# Altium PCB LT5560.PcbDoc
Units mil, origin at the board's own origin, x right, y up, seen from the top; angles counter-clockwise.
Board outline 1523 x 629 mil, 4 copper layers (Top Layer, Layer 1, Layer 2, Bottom Layer), stack 23.756 mil thick; 28 components, 20 nets, 83 pads, 39 vias.
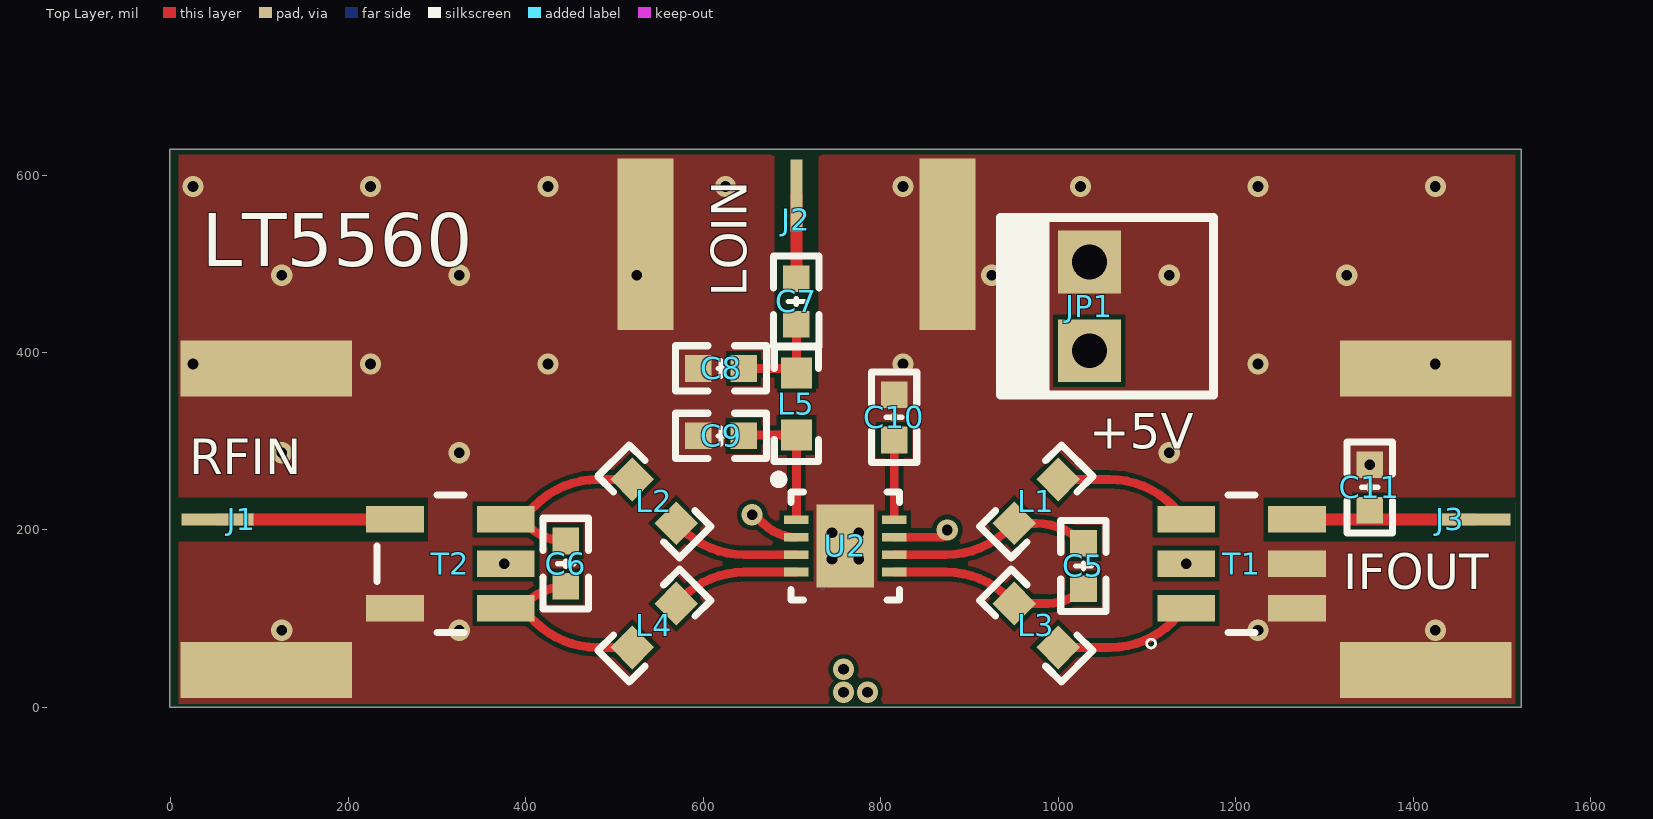
[diagram p0: Top Layer view]
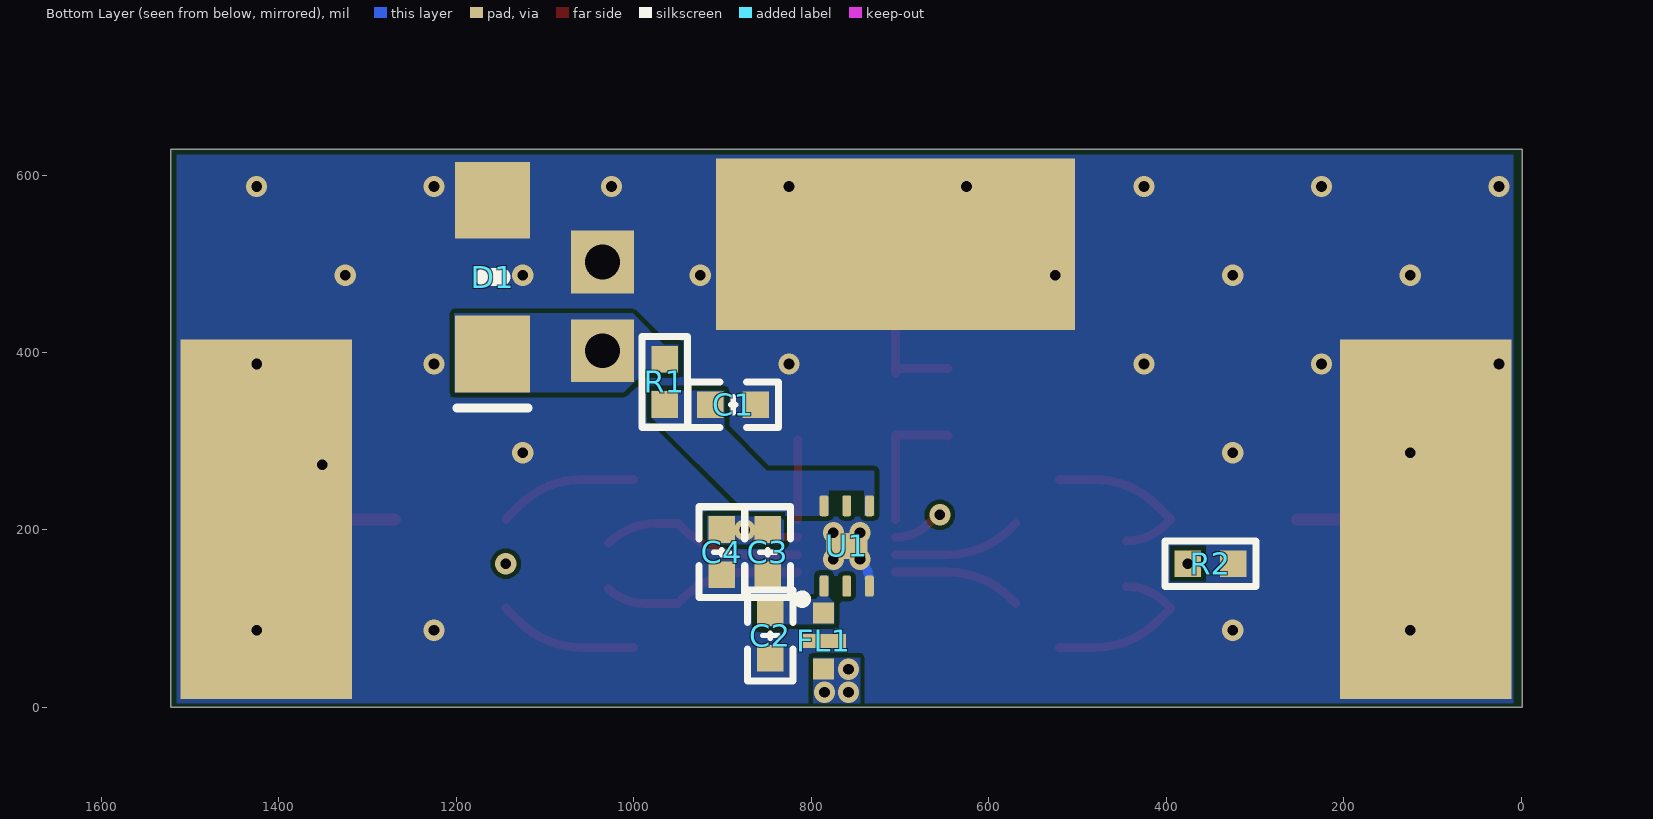
[diagram p1: Bottom Layer view, seen from below]
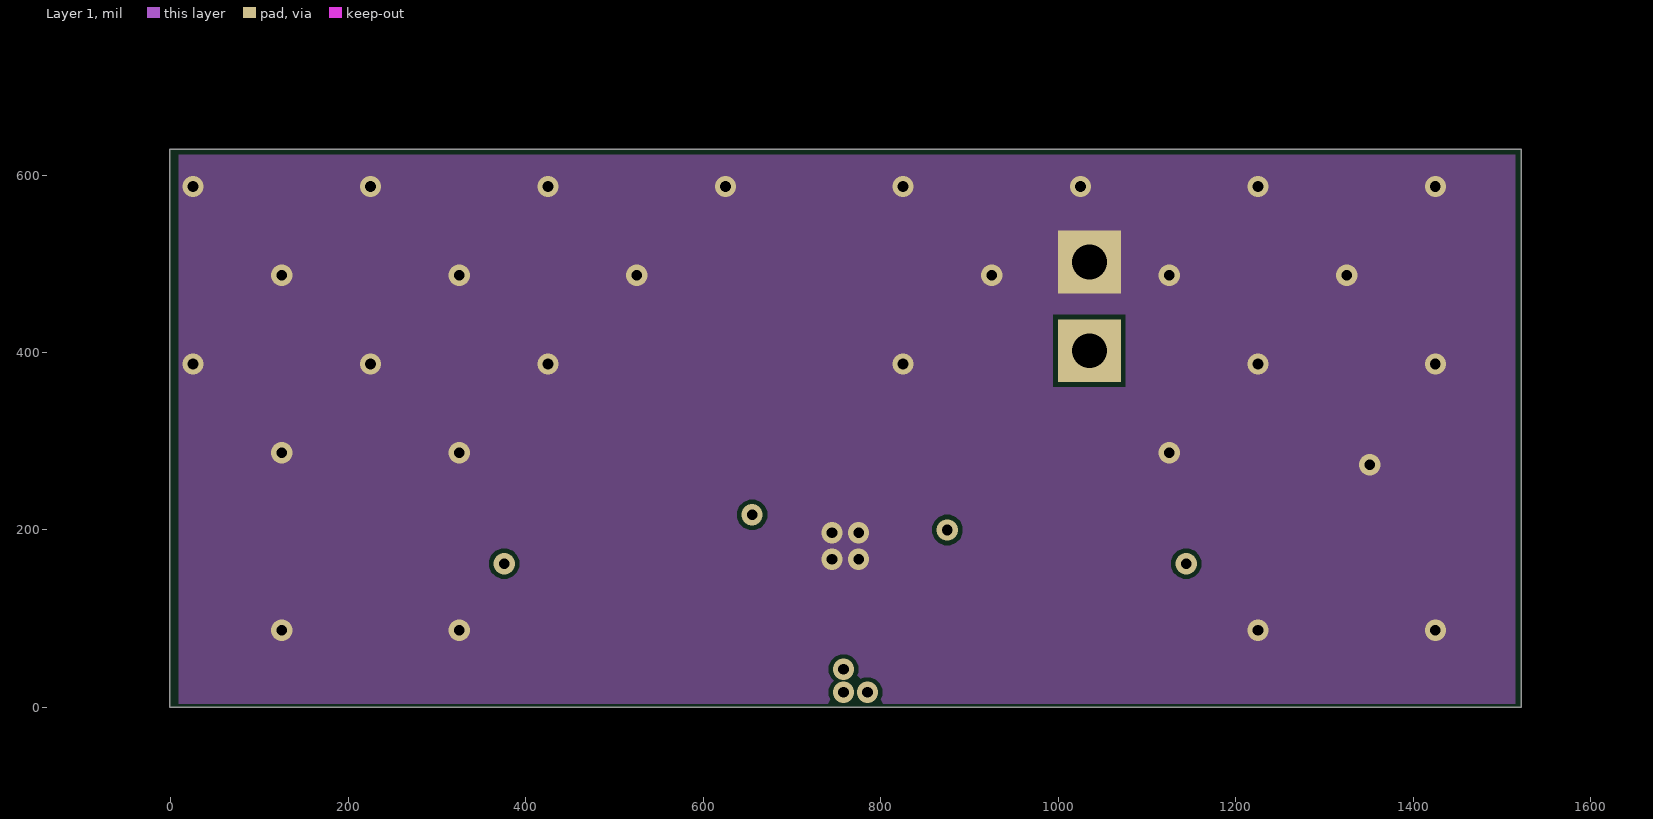
[diagram p2: Layer 1]
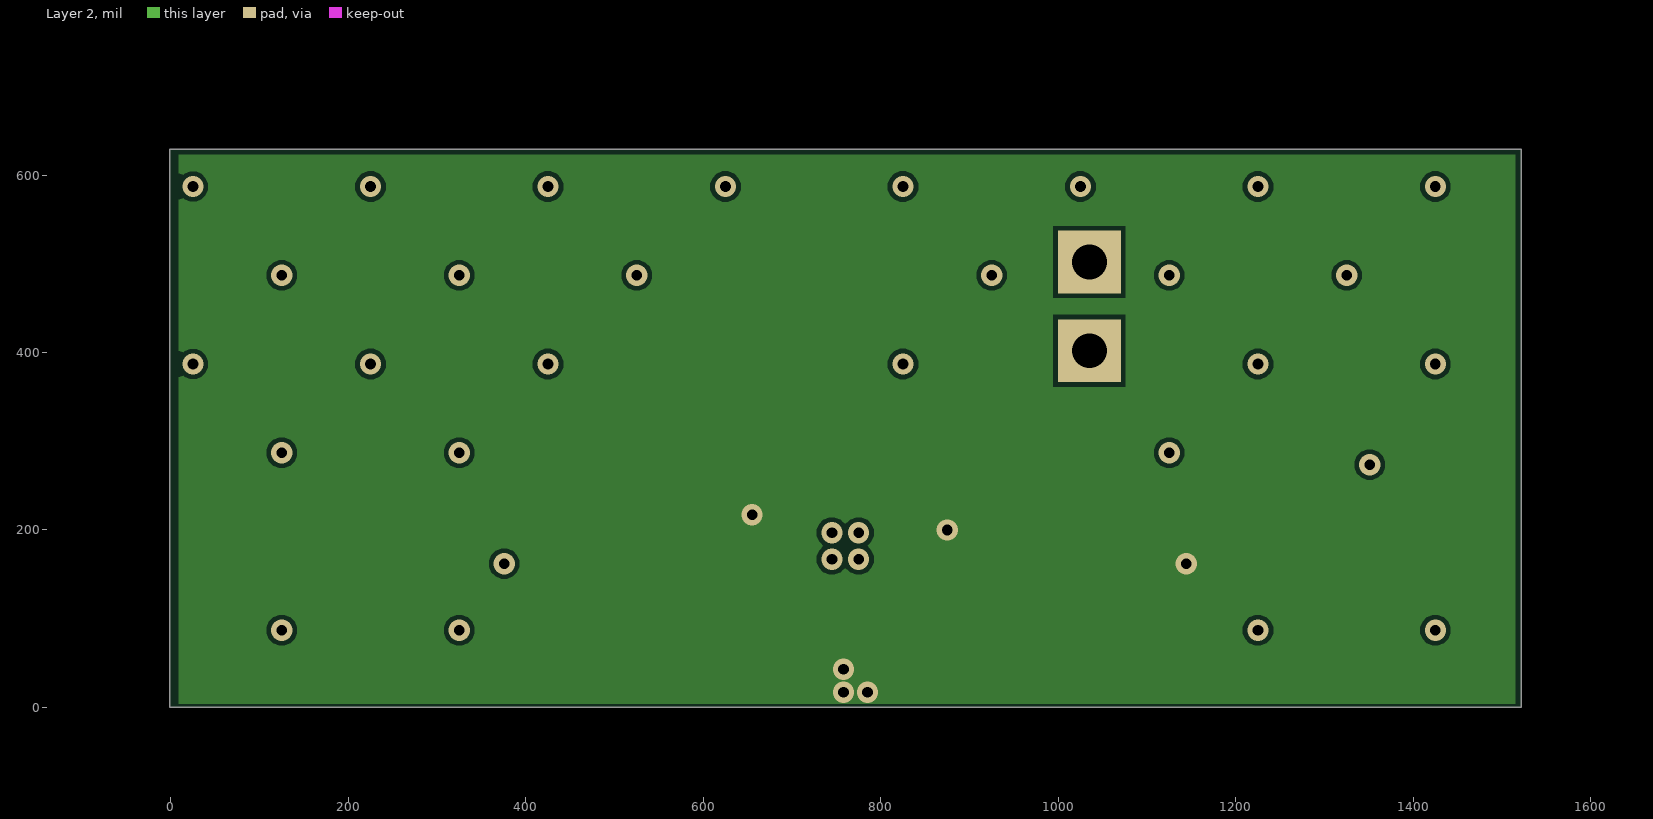
[diagram p3: Layer 2]
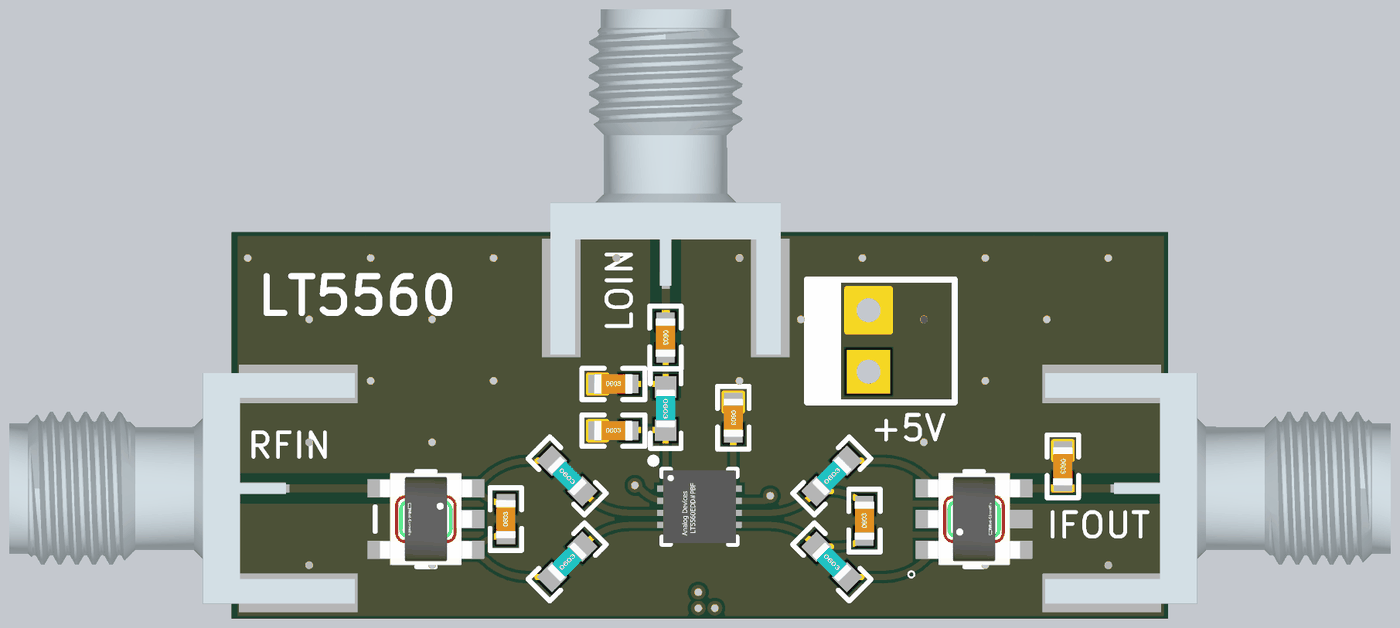
[diagram p4: 3D render of the assembled board from above, using the file's embedded part models]
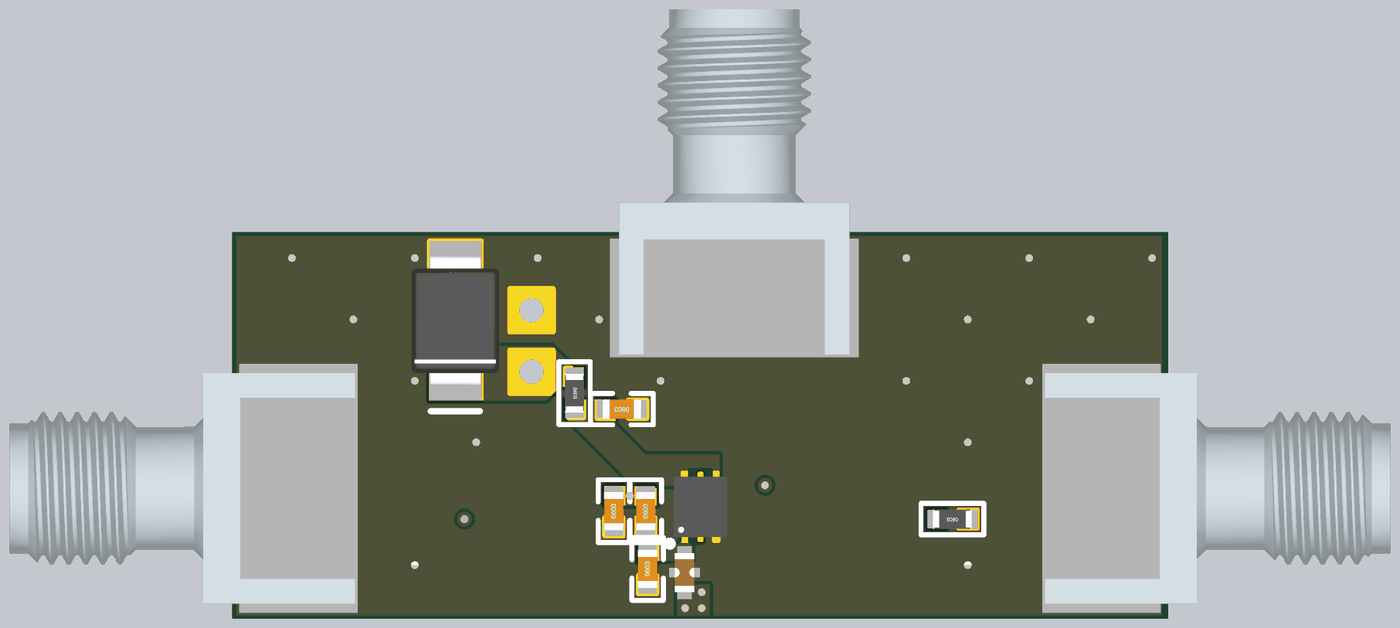
[diagram p5: 3D render of the assembled board from below, using the file's embedded part models]

## Layer stack, top to bottom
Top Solder: solder mask 0.4, Solder Resist, Dk 3.5
Top Layer: signal copper 1.4
Dielectric 2: prepreg 2.8, PP-006, Dk 4.1
Layer 1: signal copper 1.378
Dielectric 1: dielectric 12.6, FR-4, Dk 4.8
Layer 2: signal copper 1.378
Dielectric 3: prepreg 2.8, PP-006, Dk 4.1
Bottom Layer: signal copper 1.4
Bottom Solder: solder mask 0.4, Solder Resist, Dk 3.5

## Board outline
-1,0 1522,0 1522,629 -1,629

## Design rules (kind name [scope] priority, off if disabled: settings)
Clearance [All] p1: gap=5 ignorepadtopadclearanceinfootprint=TRUE
PlaneConnect [All] p1: planeconnectstyle=Direct reliefexpansion=20 reliefentries=4 reliefconductorwidth=10 reliefairgap=10
PolygonConnect [All] p1: connectstyle=Direct reliefconductorwidth=10 reliefentries=4 polygonreliefangle="90 Angle" airgapwidth=10
RoutingVias [All] p1: holewidth=28 width=50 viastyle="Through Hole" minholewidth=28 minwidth=50 maxholewidth=28 maxwidth=50
SolderMaskExpansion [All] p1: expansion=4 istentingtop=FALSE
Width [All] p1: maxlimit=15 minlimit=10 preferedwidth=10
29 further rules are at their usual default settings.

## Components (designator, comment, footprint, x,y, rotation, side; value= is the part's Value field where it differs from the comment)
C1 "1uF" "C 0603_L" 888,341 r0 bottom
C2 "1uF" "C 0603_L" 846,81 r90 bottom
C3 "1uF" "C 0603_L" 849,175.01 r90 bottom
C4 "1nF" "C 0603_L" 901,175 r90 bottom
C5 "0.5pF" "C 0603_L" 1028.4,159.47 r90 top
C6 "39pF" "C 0603_L" 445,162 r90 top
C7 "1nF" "C 0603_L" 704.6,457.55 r270 top
C8 "OPEN" "C 0603_L" 620,382 r0 top
C9 "8.2pF" "C 0603_L" 620,306 r0 top
C10 "1nF" "C 0603_L" 815,327 r270 top
C11 "OPEN" "C 0603_L" 1351,248 r270 top
D1 "SMBJ5.0A" SMBJ5.0A 1159,485 r90 bottom
FL1 "NFM18PC104R1C3D" FIL_NFM18PC104R1C3D 786,75 r270 bottom
J1 "132414" CONN_132414_AMP -92.5,212 r90 top
J2 "132414" CONN_132414_AMP 705,722 r0 top
J3 "132414" CONN_132414_AMP 1614.13,212 r270 top
JP1 "HDR-1X2" KF2510-LI-2P 1035,452 r90 top
L1 "120nH" "L 0603" 975.22,232.26 r45 top
L2 "33nH" "L 0603" 544.78,232.26 r315 top
L3 "120nH" "L 0603" 975.22,92.37 r315 top
L4 "33nH" "L 0603" 544.78,92.37 r45 top
L5 "68nH" "L 0603" 705,342 r270 top
R1 "120Ω磁珠" "R 0603_L" 965,367 r270 bottom
R2 "?" "R 0603_L" 350,162 r0 bottom
T1 "TC4-1T+" TC4-1T+-Footprint-1 1204.63,162 r90 top
T2 "TC1-1T+" FP-TC1-1-13M+-MFG 315,162 r270 top
U1 "LP5900SD-3.3/NOPB" LP5900-3.3/NOPB 760,182 r90 bottom
U2 "LT5560EDD#PBF" FP-DD-8-05-08-1698-MFG 760,182 r0 top

## Footprints (in the part's own frame and the unit in brackets; to place one, negate y for a bottom-side part, rotate by r counter-clockwise, add the part's x,y. Pads: shape width x height; smd on the part's side, far side on the other; paste and mask are expansions set on the pad)
"C 0603_L" [mil] "无极性贴片电容"
  rect 30x30 smd: 1(-25.59,0) 2(25.59,0)
  silkscreen extent -51,-26 51,26, body extent -31,-16 31,16, height 32
CONN_132414_AMP [mil]
  rect 13.48x81 smd paste+0 mask+0: 1(0,-145)
  rect 63x193 smd mask+0: 2(-170,-200) 3(170,-200)
  rect 405x193 smd far side mask+0: 4(0,-200)
  body extent -188,-292 188,270, height 162
FIL_NFM18PC104R1C3D [mm]
  rect 0.6x0.6 smd mask+0: 1(-0.8,0) 3(0.8,0)
  rect 0.4x1.27 smd mask+0: 2(0,0)
  rect 0.4x1.27 on Bottom Solder mask+0: ""(0,0)
  body extent -0.8,-0.4 0.8,0.4, height 0.7
FP-DD-8-05-08-1698-MFG [mm]
  rect 0.7x0.254 smd paste+0 mask+0: 1(-1.4,0.75) 2(-1.4,0.25) 3(-1.4,-0.25) 4(-1.4,-0.75) 5(1.4,-0.75) 6(1.4,-0.25) 7(1.4,0.25) 8(1.4,0.75)
  rect 1.65x2.38 smd paste+0 mask+0: 9(0,0)
  silkscreen extent -2.03,-1.55 1.55,2.03, body extent -1.85,-1.8 1.85,1.8, height 0.25
FP-TC1-1-13M+-MFG [mil]
  rect 30x65 smd paste+0 mask+0: 1(-50,62.5) 2(0,62.5) 3(50,62.5) 4(50,-62.5) 6(-50,-62.5)
  silkscreen extent -78,-82 78,15, body extent -81,-99 81,99, height 10
KF2510-LI-2P [mm] "接插件/2A"
  rect 1.8x1.8 hole 1: 1(-1.27,0) 2(1.27,0)
  silkscreen extent -2.59,-3.56 2.54,2.54, body extent -2.54,-3.5 2.54,2.4, height 11.05
"L 0603" [mil] "小功率贴片电感"
  rect 35x35 smd: 1(-35,0) 2(35,0)
  silkscreen extent -65,-25 65,25, body extent -31,-16 31,16, height 31
LP5900-3.3/NOPB [mm] "SON, 6-Leads, Body 2.2x2.5mm, Pitch 0.65mm, NSC Recommended (SC-70 Land)"
  rrect40% 0.6x0.25 smd paste-0.125 mask+0.051: 1(-1.15,0.65) 2(-1.15,0) 3(-1.15,-0.65) 4(1.15,-0.65) 5(1.15,0) 6(1.15,0.65)
  rrect13% 0.75x1.2 smd paste-0.6 mask+0.051: 7(0,0)
  silkscreen extent -1.65,1.15 -1.4,1.39, body extent -1.25,-1.1 1.25,1.1, height 0.8
"R 0603_L" [mil] "1/10W贴片电阻 https://item.taobao.com/item.htm?ft=t&id=613637044352"
  rect 30x30 smd: 1(-25.59,0) 2(25.59,0)
  silkscreen extent -51,-26 51,26, body extent -31,-16 31,16, height 16
SMBJ5.0A [mm]
  rect 2.2x2.15 smd: 1(-2.2,0) 2(2.2,0)
  silkscreen extent -3.74,-1.02 0,1.02, body extent -2.68,-1.81 2.68,1.81, height 2.65
TC4-1T+-Footprint-1 [mil]
  rect 30x65 smd paste+0 mask+0: 1(-50,60.5) 2(0,60.5) 3(50,60.5) 4(50,-64.5) 5(0,-64.5) 6(-50,-64.5)
  silkscreen extent -95,-17 78,105, body extent -81,-101 81,97, height 10

## Part data
C1 C2 C3 C4 C5 C6 C7 C8 C9 C10 C11: library part C, "贴片电容", BOM名称=贴片电容, 下单链接=https://item.taobao.com/item.htm?ft=t&id=613637044352, 淘宝ID=小糖豆的小窝窝
D1: "SMBJX.XA Seires TVS", Package="DO-214 Littelfuse", Availability="In Stock", Check_prices=https://www.snapeda.com/parts/SMBJ5.0A/Littelfuse+Inc/view-part/?ref=eda, MF=Littelfuse, MP=SMBJ5.0A, Price=None, Purchase-URL=https://pricing.snapeda.com/search/part/SMBJ5.0A/?ref=eda, SnapEDA_Link=https://www.snapeda.com/parts/SMBJ5.0A/Littelfuse+Inc/view-part/?ref=snap
FL1: "SMD Capacitor with Capacitance: 0.10uF Tol. 20%. Rated Voltage: 16Vdc", Package=NONSTANDARD, Digi-Key_Part_Number=490-6969-1-ND, Digi-Key_Purchase_URL=https://www.digikey.com/product-detail/en/murata-electronics/NFM18PC104R1C3D/490-6969-1-ND/3846166?utm_source=snapeda&utm_medium=aggregator&utm_campaign=symbol, MF=Murata, MP=NFM18PC104R1C3D, SnapEDA_Link=https://www.snapeda.com/parts/NFM18PC104R1C3D/Murata/view-part/4375738/?ref=snap
J1 J2 J3: "No Description Available", Mfr_Name="Amphenol ICC", Copyright="Copyright (C) 2022 Ultra Librarian. All rights reserved.", Manufacturer_Part_Number=132414, RefDes=RefDes, Type=DEV
JP1: library part "Header 2", "2P接插件", BOM名称=2P接插件, 下单链接=https://item.taobao.com/item.htm?ft=t&id=613637044352, 淘宝ID=小糖豆的小窝窝
L1 L2 L3 L4 L5: library part L, "小功率贴片电感", BOM名称=小功率贴片电感, 下单链接=https://item.taobao.com/item.htm?ft=t&id=613637044352
R1 R2: library part R, "贴片电阻", BOM名称=贴片电阻, 下单链接=https://item.taobao.com/item.htm?ft=t&id=613637044352, 淘宝ID=小糖豆的小窝窝
T1: "Xfmr, Isolation, 50 ohm, 4: 1, 0.5-300 MHz, SMT"
T2: library part CMP-00025-00004-7, "RF Transformer 1: 1 5 Terminal SMD", RoHS Compliant=No
U1: "Ultra Low Noise, 150mA Linear Regulator for RF/Analog Circuits Requires No Bypass Capacitor, 6-pin LLP, Pb-Free", Manufacturer="Texas Instruments", PackageTopMarking=XTT*L16, PowerWise=N, ComponentLink1Description="Datasheet URL", ComponentLink1URL=http://www.ti.com/general/docs/lit/getliterature.tsp?genericPartNumber=LP5900&fileType=pdf, CompType="LDO IC", PackageDescription="LLP, Plastic, Dual, 2.2 x 2.5 x 0.8mm Body, 6 Lead, 0.65mm Pitch, No Pullback", PackageReference=NGF0006A, PinCount=6, RoHS=Y
U2: library part LT5560EDD, "IC MIXER 10KHZ-4GHZ UP/DWN 8DFN", Case/Package=DFN, Frequency=10kHz, Max Frequency=4GHz, Max Operating Temperature=85°C, Max Supply Voltage=5V, Min Operating Temperature=-40°C, Min Supply Voltage=2.7V, Operating Supply Current=12mA, Operating Supply Voltage=3V, Package Quantity=121, Power Gain=2.7dB, Bandwidth=4GHz, Gain=2.4dB, Height=0.7mm, Lead Free="Lead Free", Length=3mm, Min Frequency=10kHz, Mount="Surface Mount", Noise Figure=9.3dB, Number of Pins=8, Packaging=Rail/Tube, Radiation Hardening=No, RoHS Compliant=Yes, Series=LT5560, Width=3mm

## Via types
v1: diameter 24, hole 12, Top Layer to Bottom Layer, tented both sides, 39 vias

## Nets (pads, with @x,y where several pads share a name; then routed paths per layer and width w, separated by ;. In a path a pad name is that pad's centre, name@x,y a point inside that pad or via, vN(x,y) a via of type N, cw(c..) or ccw(c..) an arc to the next point about the centre after c; other vN are vias at no path point)
+3.3: C3.2 C4.2 FL1.3 T1.2 U2.2 U2.7 | length 119.6
  Top Layer w10: v1@658,217 667.8,207.2 ccw(c704.88,244.29) U2.2 ; U2.7 866.84,191.84 ccw(c866.84,200) v1(875,200)
  other v1: 758,17 785,17 758,43 1144.13,162 655,217
+5: D1.1 JP1.1 R1.1
GND: C1.1 C2.1 C3.1 C4.1 C8.1 C9.1 C10.1 C11.1 D1.2 FL1.2 J1.2 J1.3 J1.4 J2.2 J2.3 J2.4 J3.2 J3.3 J3.4 JP1.2 R2.1 T1.5 T1.6 T2.4 U1.3 U1.7 U2.9 | length 33.1
  Bottom Layer w10: U1.3 734.41,141.43 cw(c770.57,141.43) v1(745,167)
  other v1: 125,87 325,87 1225,87 1425,87 775,167 745,197 775,197 1351,273.59 125,287 325,287 1125,287 25,387 225,387 425,387 825,387 1225,387 1425,387 125,487 325,487 525,487 925,487 1125,487 1325,487 25,587 225,587 425,587 625,587 825,587 1025,587 1225,587 1425,587
INN: L4.2 U2.4 | length 145.7
  Top Layer w10: L4.2 575.59,123.18 cw(c646.3,52.47) 646.3,152.47 U2.4
INP: L2.2 U2.3 | length 145.7
  Top Layer w10: L2.2 575.59,201.45 ccw(c646.3,272.16) 646.3,172.16 U2.3
LON: C9.2 L5.2 U2.1 | length 155.2
  Top Layer w10: C9.2 cw(c648.01,303.57) 648.01,307 L5.2 704.88,306.88 U2.1
LOP: C10.2 U2.8 | length 89.9
  Top Layer w10: C10.2 815.12,301.29 U2.8
NetC1_2: C1.2 R1.2 U1.4 U1.6
NetC2_2: C2.2 FL1.1 U1.1
NetC5_1: C5.1 L3.1 U2.5 | length 228.1
  Top Layer w10: U2.5 873.7,152.47 cw(c873.7,52.47) 944.41,123.18 L3.1 987.95,117.12 ccw(c987.95,174.33) C5.1
NetC5_2: C5.2 L1.1 U2.6 | length 229.6
  Top Layer w10: U2.6 873.7,172.16 ccw(c873.7,272.16) 944.41,201.45 L1.1 974.19,207.51 cw(c974.19,130.84) C5.2
NetC6_1: C6.1 L4.1 T2.3 | length 196.6
  Top Layer w10: C6.1 ccw(c445,74.61) 401.31,118.31 395,112 410.09,96.91 ccw(c480.8,167.62) 480.8,67.62 L4.1
NetC6_2: C6.2 L2.1 T2.1 | length 196.8
  Top Layer w10: C6.2 cw(c445,249.37) 401.32,205.68 395,212 410.72,227.72 cw(c481.43,157.01) 481.43,257.01 L2.1
NetC7_1: C7.1 J2.1 | length 94
  Top Layer w10: C7.1 C7.1@705,483.55
  Top Layer w13.48: C7.1@705,483.55 J2.1
NetC7_2: C7.2 C8.2 L5.1 | length 116.6
  Top Layer w10: C8.2 700,382 L5.1 705,431.56 C7.2
NetC11_2: C11.2 J3.1 T1.4 | length 200
  Top Layer w13.48: T1.4 J3.1
NetJ1_1: J1.1 T2.6 | length 200
  Top Layer w13.48: J1.1 T2.6
NetL1_2: L1.2 T1.3 | length 158.5
  Top Layer w10: L1.2 1057.7,257.01 cw(c1057.7,157.01) 1128.41,227.72 T1.3
NetL3_2: L3.2 T1.1 | length 158.2
  Top Layer w10: L3.2 1058.33,67.62 ccw(c1058.33,167.62) 1129.04,96.91 T1.1
NetR2_2: R2.2 T2.2
  other v1: 375.59,162
pads on no net: FL1. U1.2 U1.5

## Polygon pours and split planes (outlines as drawn)
GND on Bottom Layer "NONET_L-01_P-001" (solid, remove dead copper, pour order 11): 9,623 1515,623 1515,5 9,5
+3.3 on Bottom Layer "NONET_L-01_P-001" (solid, remove dead copper, pour order 5): 798,56 745,56 745,5 798,5
+3.3 on Bottom Layer "NONET_L-01_P-001" (solid, remove dead copper, pour order 4): 831,184 917,184 917,216 831,216
NetC2_2 on Bottom Layer "NONET_L-01_P-001" (solid, remove dead copper, pour order 3): 780.21,149 780.21,124.21 774,118 774,94 829,94 832,91 861,91 861,122 795,122 791,126 791,149
NetC1_2 on Bottom Layer "NONET_L-01_P-001" (solid, remove dead copper, pour order 2): 729,216 740,216 740,245 780,245 780,216 869,216 980,327 980,357 898,357 898,315 850,267 729,267
+5 on Bottom Layer "NONET_L-01_P-001" (solid, remove dead copper, pour order 0): 950,377 989,377 1011,355 1202,355 1202,444 1001,444 966,409 950,409
GND on Top Layer "NONET_L-01_P-001" (solid, remove dead copper, pour order 6): 9,623 9,4 1515,4 1515,623 1492,623
GND on Layer 1 "NONET_L-01_P-001" (solid, remove dead copper, pour order 7): 9,623 9,4 1515,4 1515,623 1492,623
+3.3 on Layer 2 "NONET_L-01_P-001" (solid, remove dead copper, pour order 8): 9,623 9,4 1515,4 1515,623 1492,623

## Other copper
Top Layer:
  pour cut-out: 9,187 9,237 290,237 290,187
  pour cut-out: 1231,187 1231,237 1515,237 1515,187
  pour cut-out: 680,621 730,621 730,359 680,359

## Silkscreen, mask and mechanical layers (free items; w line width, h text height)
Top Overlay:
  text "LT5560" at 35,497 h60
  text "LOIN" at 649,463 h40 r90
  text "+5V" at 1034.76,291.32 h40
  text "RFIN" at 21,263 h40
  text "IFOUT" at 1321,133 h40
Mechanical 1:
  the board outline again, w6